# Altium PCB P-FTINT-1-1.PcbDoc
Units mm, origin at the board's own origin, x right, y up, seen from the top; angles counter-clockwise.
Board outline 50.02 x 70.01 mm, 2 copper layers (Component Side, Solder Side); 26 components, 40 nets, 145 pads, 13 vias.
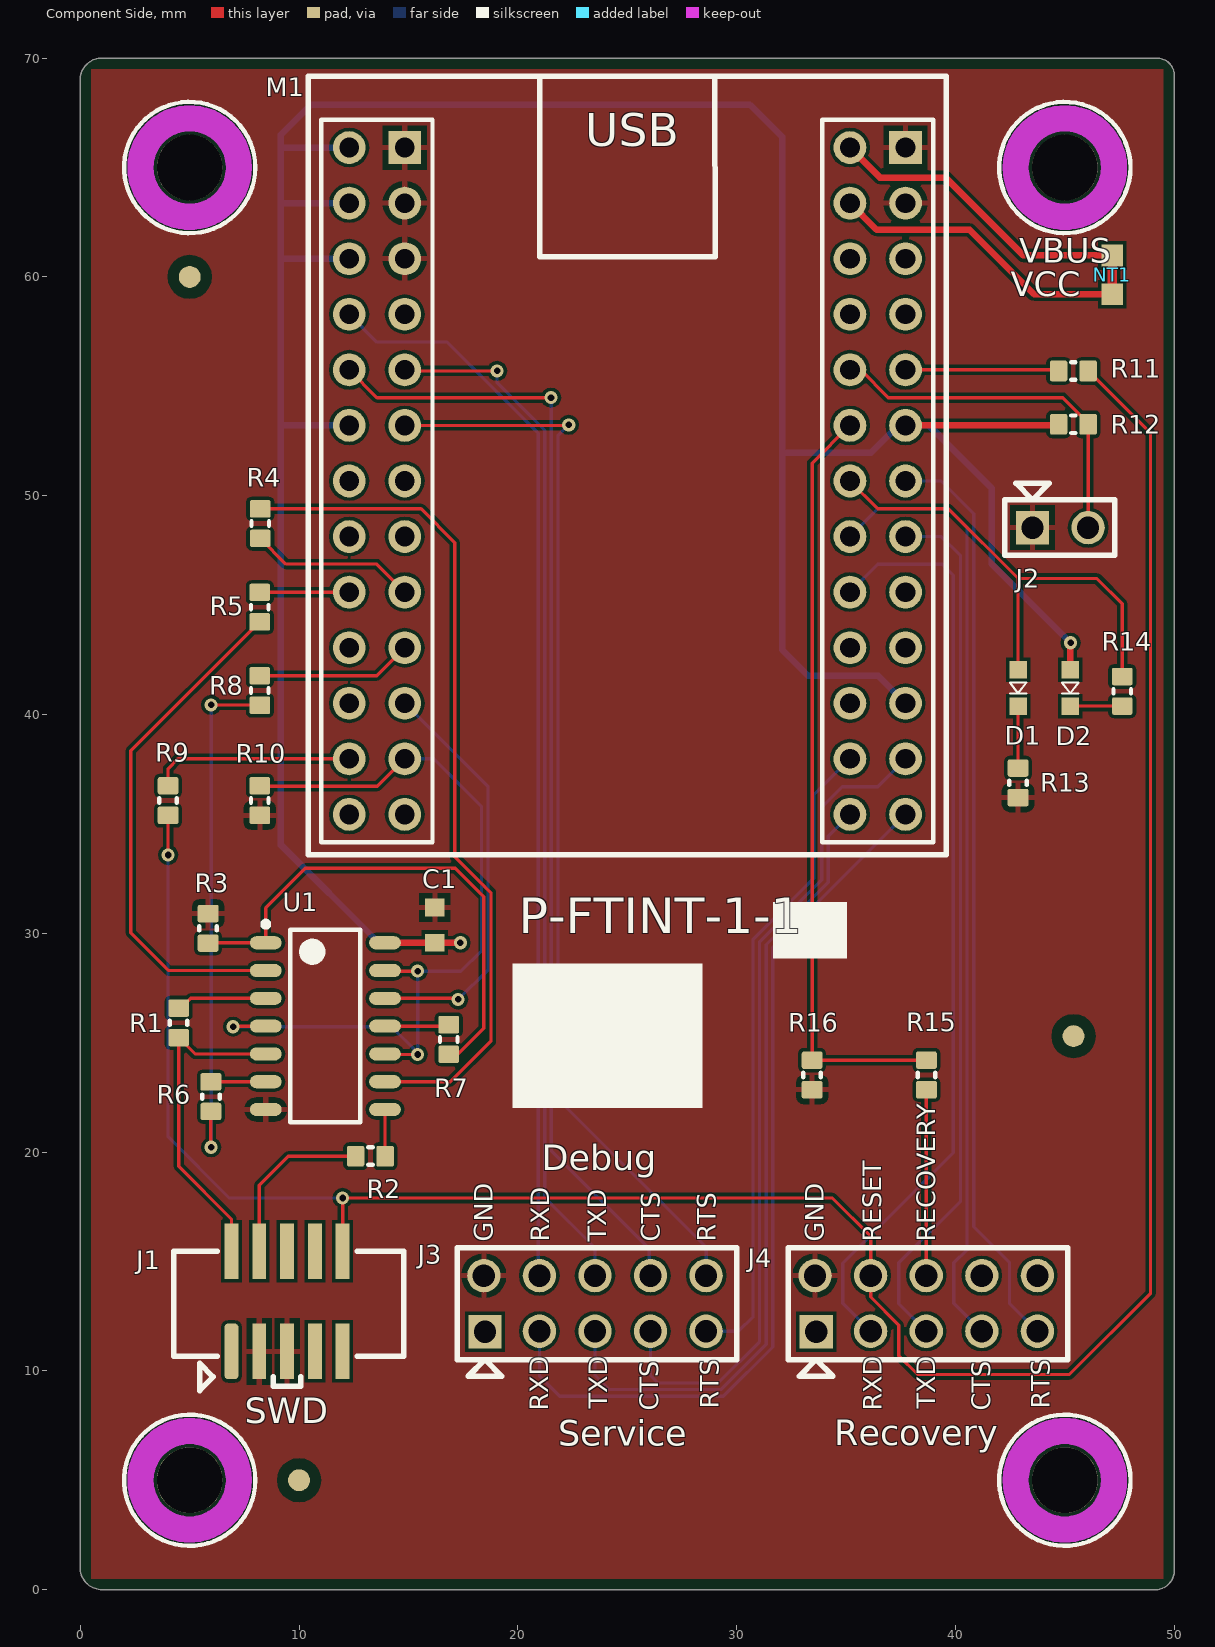
[diagram p0: Component Side view]
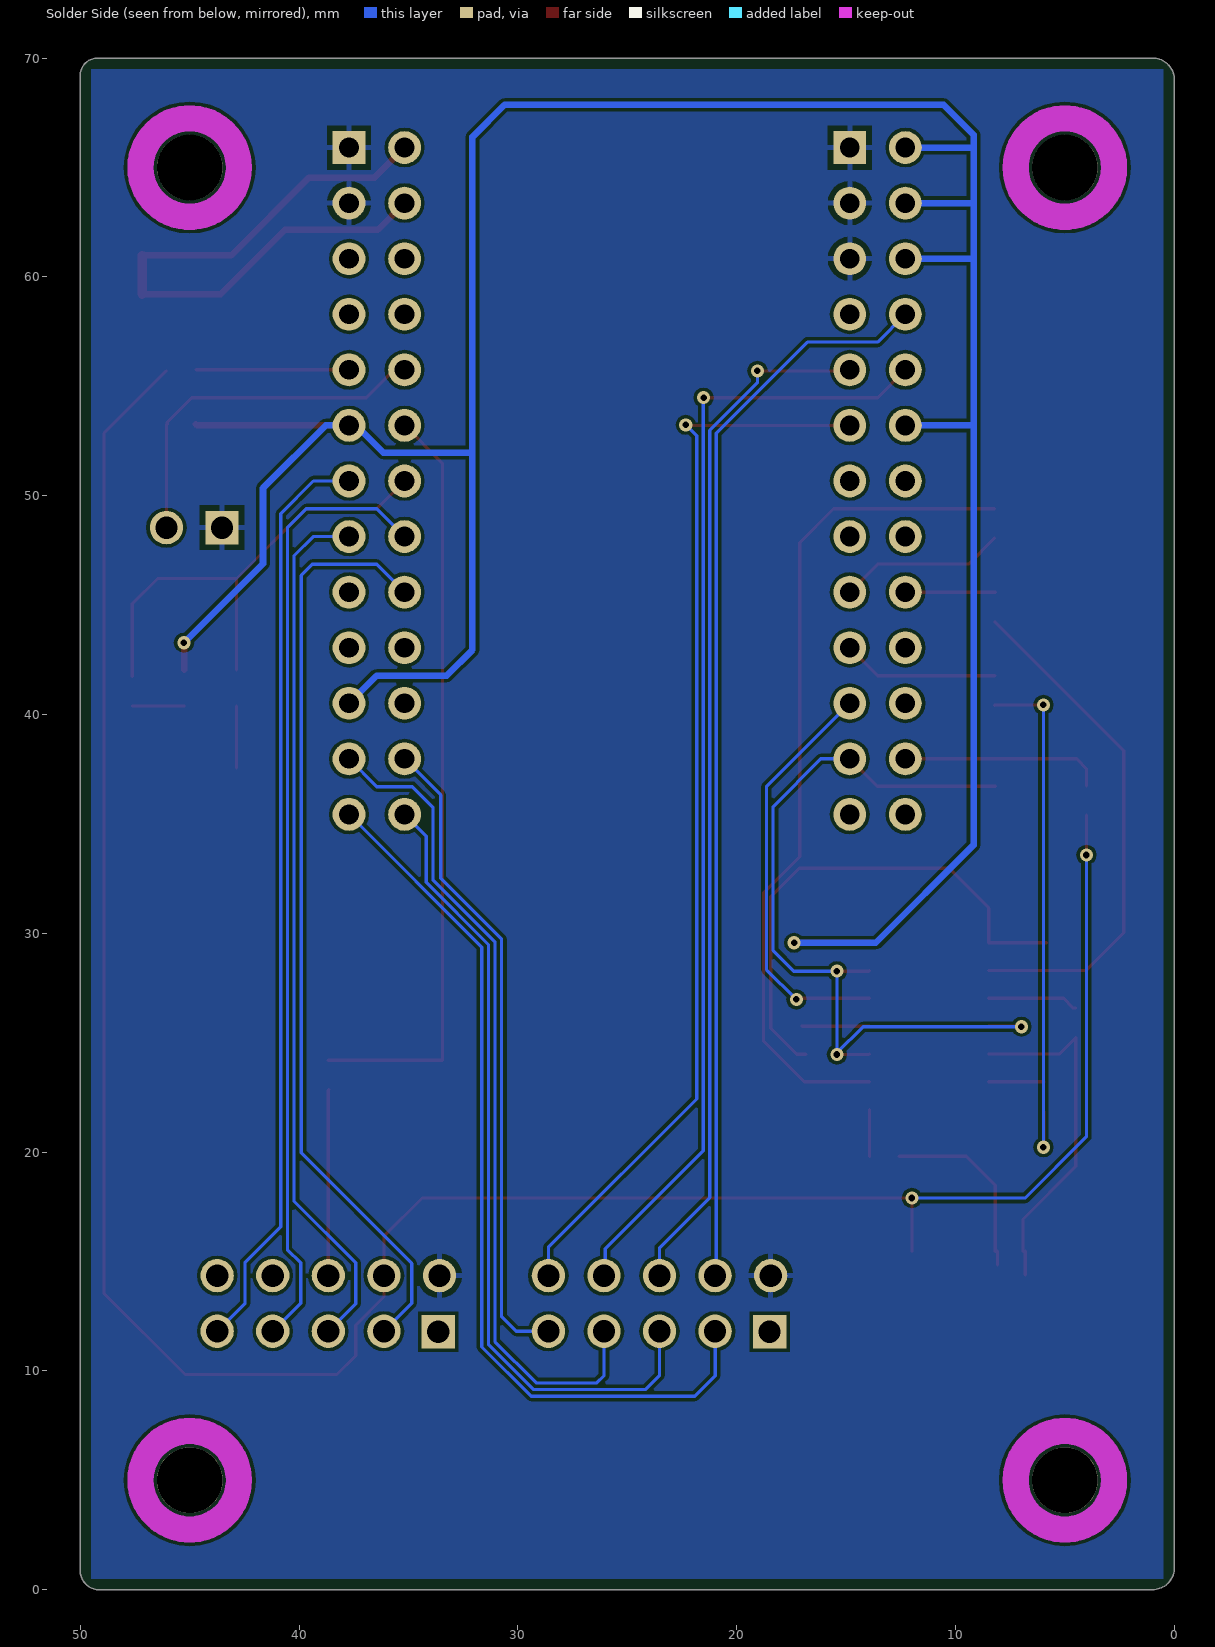
[diagram p1: Solder Side view, seen from below]

## Layer stack, top to bottom
Top Solder: solder mask 0.0102, Solder Resist, Dk 3.5
Component Side: signal copper 0.0356
Dielectric 1: core 0.32, FR-4, Dk 4.8
Solder Side: signal copper 0.0356
Bottom Solder: solder mask 0.0102, Solder Resist, Dk 3.5

## Board outline
-0.009,1 -0.009,69.002 cw(c0.991,69.002) 0.991,70.002 0.991,70 49.213,70 cw(c49.213,69.202) 50.011,69.202 50.011,0.889 cw(c49.109,0.889) 49.109,-0.013 49.109,0 0.991,0 cw(c0.991,1)

## Design rules (kind name [scope] priority, off if disabled: settings)
Clearance Clearance_RF [InNetClass('RF') vs InNet('GND')] p1: gap=0.17 ignorepadtopadclearanceinfootprint=FALSE
Clearance Clearance_RFD [InNetClass('RFD') vs InNet('GND')] p2: gap=0.127 ignorepadtopadclearanceinfootprint=FALSE
Clearance Clearance_Fiducials [(IsPad) AND (Name = 'Free-1') vs InNet('GND')] p3: gap=0.5 ignorepadtopadclearanceinfootprint=FALSE
Clearance [All] p4: gap=0.15 ignorepadtopadclearanceinfootprint=FALSE
ComponentClearance [All] p1: gap=0.125 collisioncheckmode=3 verticalgap=0.254 showdistances=FALSE
DiffPairsRouting [All] p1: maxlimit=0.3 minlimit=0.125 mostfreqgap=0.125 toplayer_minwidth=0.125 toplayer_maxwidth=0.3 toplayer_prefwidth=0.125 bottomlayer_minwidth=0.125 bottomlayer_maxwidth=0.3 bottomlayer_prefwidth=0.125 maxuncoupledlength=12.7
HoleSize [All] p1: absolutevalues=TRUE maxlimit=3 minlimit=0.2 maxpercent=80.000 minpercent=20.000
MinimumSolderMaskSliver [All] p1: minsoldermaskwidth=0.01
PlaneClearance [All] p1: clearance=0.3
PlaneConnect PlaneConnect_IsVia [IsVia] p1: planeconnectstyle=Direct reliefexpansion=0.508 reliefentries=4 reliefconductorwidth=0.254 reliefairgap=0.254
PlaneConnect [All] p2: planeconnectstyle=Relief reliefexpansion=0.508 reliefentries=4 reliefconductorwidth=0.254 reliefairgap=0.254
PolygonConnect PolygonConnect_IsVia [IsVia] p1: connectstyle=Direct reliefconductorwidth=0.254 reliefentries=4 polygonreliefangle="90 Angle" airgapwidth=0.254
PolygonConnect PolygonConnect_RF [HasCompParameter('NoThermalRelief')] p2: connectstyle=Direct reliefconductorwidth=0.254 reliefentries=4 polygonreliefangle="90 Angle" airgapwidth=0.254
PolygonConnect [All] p3: connectstyle=Relief reliefconductorwidth=0.254 reliefentries=4 polygonreliefangle="90 Angle" airgapwidth=0.254
RoutingCorners [All] p1: cornerstyle=45-Degree minsetback=1 maxsetback=1
RoutingVias [All] p1: holewidth=0.3 width=0.6 viastyle="Through Hole" minholewidth=0.3 minwidth=0.6 maxholewidth=0.3 maxwidth=0.6
SilkToSilkClearance [All] p1: silktosilkclearance=0.05
SilkToSolderMaskClearance [IsPad] p1: minsilkscreentomaskgap=0.1 clearancetoexposedcopper=TRUE
SolderMaskExpansion [All] p1: expansion=0.102
Width Width_1 [InNet('GND')] p1: maxlimit=0.3 minlimit=0.15 preferedwidth=0.3
Width Width_VCC [InNet('VCC')] p2: maxlimit=0.3 minlimit=0.15 preferedwidth=0.3
Width Width_VBUS [InNet('VBUS')] p3: maxlimit=0.3 minlimit=0.15 preferedwidth=0.3
Width "Width 3V3" [InNet('3V3')] p4: maxlimit=0.3 minlimit=0.15 preferedwidth=0.3
Width [All] p5: maxlimit=0.8 minlimit=0.15 preferedwidth=0.15
21 further rules are at their usual default settings.

## Components (designator, comment, footprint, x,y, rotation, side; value= is the part's Value field where it differs from the comment)
C1 "0.1uF" "CAP 0603 (1608) x 1.2mm" 16.205,30.378 r270 top
D1 "SML-D12U" "Rohm SML-D12 Red" 42.862,41.211 r90 top
D2 "SML-D12P" "Rohm SML-D12 Green" 45.25,41.211 r90 top
J1 "FTSH-105-01-F-DV-K" SAMTEC-FTSH-105-01-X-DV-K 9.45,13.175 r90 top
J2 "MOLEX-0022284020" 0022284020 43.474,48.514 r0 top
J3 "0901310765" 901310765 18.445,11.81 r0 top
J4 "0901310765" 901310765 33.585,11.81 r0 top
M1 "FT4232H-56QMINIMDL" FT4232H-56Q 25.004,50.673 r0 top locked
NT1 "NetTie" NetTie 47.168,60.096 r90 top net-tie
R1 "33R" RES0603 4.496,25.908 r90 top
R2 "33R" RES0603 13.259,19.812 r0 top
R3 "4K7" RES0603 5.842,30.226 r90 top
R4 "33R" RES0603 8.225,48.725 r90 top
R5 "33R" RES0603 8.204,44.907 r270 top
R6 "33R" RES0603 5.969,22.53 r90 top
R7 "33R" RES0603 16.84,25.146 r90 top
R8 "33R" RES0603 8.204,41.097 r270 top
R9 "4K7" RES0603 4.013,36.068 r270 top
R10 "4K7" RES0603 8.204,36.068 r270 top
R11 "4K7" RES0603 45.39,55.702 r0 top
R12 "4K7" RES0603 45.39,53.264 r0 top
R13 "604R" RES0603 42.862,36.878 r270 top
R14 "604R" RES0603 47.625,41.061 r90 top
R15 "2K2" RES0603 38.675,23.525 r270 top
R16 "2K2" RES0603 33.45,23.525 r270 top
U1 "74LCX126MX" 74LCX126MX 11.201,25.756 r0 top

## Footprints (in the part's own frame and the unit in brackets; to place one, negate y for a bottom-side part, rotate by r counter-clockwise, add the part's x,y. Pads: shape width x height; smd on the part's side, far side on the other; paste and mask are expansions set on the pad)
74LCX126MX [mm] "SOIC, 14-Leads, Body 8.63x3.90mm, Pitch 1.27mm, IPC Medium Density"
  oval 1.45x0.6 smd: 1(-2.725,3.81) 2(-2.725,2.54) 3(-2.725,1.27) 4(-2.725,0) 5(-2.725,-1.27) 6(-2.725,-2.54) 7(-2.725,-3.81) 8(2.725,-3.81) 9(2.725,-2.54) 10(2.725,-1.27) 11(2.725,0) 12(2.725,1.27) 13(2.725,2.54) 14(2.725,3.81)
  silkscreen extent -2.85,-4.4 1.6,4.78, body extent -2,-4.4 2,4.4, height 1.75
0022284020 [mil] "2-way header"
  rect 60x60 hole 40: 1(2,1)
  round 60 hole 40: 2(102,1)
  silkscreen extent -48,-49 150,81, body extent -50,-49 150,49, height 330
901310765 [mil] "2-row 5-way header"
  rect 60x60 hole 40: 1(2,-1)
  round 60 hole 40: 2(0,100) 3(100,0) 4(100,100) 5(200,0) 6(200,100) 7(300,0) 8(300,100) 9(400,0) 10(400,100)
  silkscreen extent -48,-81 455,150, body extent -50,-50 450,150, height 364
"CAP 0603 (1608) x 1.2mm" [mm] "murata largest recogmended dimentions for 1608 +-0.2mm"
  rect 0.8x0.9 smd: 1(-0.8,0) 2(0.8,0)
  body extent -0.9,-0.5 0.9,0.5, height 1.2
FT4232H-56Q [mm]
  rect 1.5x1.5 hole 0.9: CN2-1(-10.175,15.24) CN3-1(12.715,15.24)
  round 1.5 hole 0.9: CN2-2(-12.715,15.24) CN2-3(-10.175,12.7) CN2-4(-12.715,12.7) CN2-5(-10.175,10.16) CN2-6(-12.715,10.16) CN2-7(-10.175,7.62) CN2-8(-12.715,7.62) CN2-9(-10.175,5.08) CN2-10(-12.715,5.08) CN2-11(-10.175,2.54) CN2-12(-12.715,2.54) CN2-13(-10.175,0) CN2-14(-12.715,0) CN2-15(-10.175,-2.54) CN2-16(-12.715,-2.54) CN2-17(-10.175,-5.08) CN2-18(-12.715,-5.08) CN2-19(-10.175,-7.62) CN2-20(-12.715,-7.62) CN2-21(-10.175,-10.16) CN2-22(-12.715,-10.16) CN2-23(-10.175,-12.7) CN2-24(-12.715,-12.7) CN2-25(-10.175,-15.24) CN2-26(-12.715,-15.24) CN3-2(10.175,15.24) CN3-3(12.715,12.7) CN3-4(10.175,12.7) CN3-5(12.715,10.16) CN3-6(10.175,10.16) CN3-7(12.715,7.62) CN3-8(10.175,7.62) CN3-9(12.715,5.08) CN3-10(10.175,5.08) CN3-11(12.715,2.54) CN3-12(10.175,2.54) CN3-13(12.715,0) CN3-14(10.175,0) CN3-15(12.715,-2.54) CN3-16(10.175,-2.54) CN3-17(12.715,-5.08) CN3-18(10.175,-5.08) CN3-19(12.715,-7.62) CN3-20(10.175,-7.62) CN3-21(12.715,-10.16) CN3-22(10.175,-10.16) CN3-23(12.715,-12.7) CN3-24(10.175,-12.7) CN3-25(12.715,-15.24) CN3-26(10.175,-15.24)
  silkscreen extent -14.58,-17.09 14.58,18.5
NetTie [mm]
  rect 1x1 smd paste-1: 1(-0.889,0) 2(0.889,0)
  Component Side lines w0.42: -0.889,0 0.889,0
RES0603 [mm] "Chip Resistor EIA0603, 2-Leads, Body 1.60x0.80mm, IPC Medium Density"
  rrect25% 0.8x0.95 smd: 1(-0.675,0)
  rrect20% 0.8x0.95 smd: 2(0.675,0)
  silkscreen extent -0.1,-0.4 0.1,0.4, body extent -0.87,-0.48 0.87,0.48, height 0.45
"Rohm SML-D12 Green" [mm]
  rect 0.8x0.8 smd paste-0.05: 1(-0.825,0) 2(0.825,0)
  silkscreen extent -0.25,-0.38 0.25,0.38, body extent -0.8,-0.4 0.8,0.4, height 0.55
"Rohm SML-D12 Red" [mm]
  rect 0.8x0.8 smd paste-0.05: 1(-0.825,0) 2(0.825,0)
  silkscreen extent -0.25,-0.38 0.25,0.38, body extent -0.8,-0.4 0.8,0.4, height 0.55
SAMTEC-FTSH-105-01-X-DV-K [mil] ".050\" Micro Terminal Strip, 10 pos"
  rrect50% 100x25 smd: 1(-90,100)
  rect 100x25 smd: 2(90,100) 3(-90,50) 4(90,50) 5(-90,0) 6(90,0) 7(-90,-50) 8(90,-50) 9(-90,-100) 10(90,-100)
  silkscreen extent -160,-210 90,204, body extent -118,-125 112,125, height 242

## Part data
C1: library part CGA3E2X7R1E104K080AA, "CAP CER 0.1UF 25V X7R 0603", Capacitance=100nF, Case/Package=0603, Case Code (Metric)=1608, Dielectric=X7R, Manufacturer=TDK, Max Operating Temperature=125°C, Min Operating Temperature=-55°C, Package Quantity=1, Ratings=AEC-Q200, Supplier Part Number 1=445-5667-1-ND, Tolerance=10%, Voltage Rating=25V, Case Code (Imperial)=0603, ComponentLink1Description=http://www.farnell.com/datasheets/1735392.pdf?src-supplier=Element14, ComponentLink1URL=http://www.farnell.com/datasheets/1735392.pdf?src-supplier=Element14, ComponentLink2Description=https://product.tdk.com/info/en/documents/chara_sheet/CGA3E2X7R1E104K080AA.pdf?src-supplier=Mouser, ComponentLink2URL=https://product.tdk.com/info/en/documents/chara_sheet/CGA3E2X7R1E104K080AA.pdf?src-supplier=Mouser, ComponentLink3Description=http://product.tdk.com/capacitor/mlcc/en/documents/mlccspec_automotive_general_midvoltage_en.pdf?src-supplier=Future+Electronics, ComponentLink3URL=http://product.tdk.com/capacitor/mlcc/en/documents/mlccspec_automotive_general_midvoltage_en.pdf?src-supplier=Future+Electronics, ComponentLink4Description=http://www.farnell.com/datasheets/1913358.pdf?src-supplier=Newark, ComponentLink4URL=http://www.farnell.com/datasheets/1913358.pdf?src-supplier=Newark, Composition=Ceramic, Depth=0.8mm, Height=0.8mm, Lead Free="Lead Free", Length=1.6mm, Manufacturer Part Number=CGA3E2X7R1E104K080AA, Mount="Surface Mount", Packaging="Tape and Reel", Pricing 1="1=0.1, 10=0.057, 100=0.0253, 500=0.0181, 1000=0.01422 (USD)", REACH SVHC="No SVHC", Stock 1=1795818, Supplier 1=Digi-Key, Termination=SMD/SMT, Thickness=0.035inch, Voltage Rating (DC)=25V, Weight=7.1E-05oz, Width=0.031inch
D1: "1.6 x 0.8 x 0.55mm (0603) LED 620nm Red", Colour=Red, Current - Test=20mA, Luminous Flux @ Current - Test=-, Manufacturer="Rohm Semiconductor", Manufacturer Part Number=SML-D12U8WT86, Millicandela Rating=63mcd, Package / Case="0603 (1608 Metric)", Supplier Part Number 1=511-1580-1-ND, Voltage - Forward (Vf) (Typ)=2.2V, Category=Optoelectronics, ComponentLink1Description=http://rohmfs.rohm.com/en/products/databook/datasheet/opto/led/chip_mono/sml-d1.pdf, ComponentLink1URL=http://rohmfs.rohm.com/en/products/databook/datasheet/opto/led/chip_mono/sml-d1.pdf, Height=0.55mm, Lens Style/Size="Rectangle with Flat Top, 1.2mm x 0.8mm", Lens Type="Diffused, White", Mounting Type="Surface Mount", Packaging="Cut Tape (CT)", Pricing 1="1=0.38, 10=0.279, 25=0.2232, 100=0.1478, 250=0.1046, 500=0.08926, 1000=0.06974 (GBP)", RoHS="RoHS Compliant", Size / Dimension="1.60mm L x 0.80mm W", Stock 1=5722, Supplier 1=Digi-Key, Supplier 2=Farnell, Supplier Part Number 2=1685094, Viewing Angle=-, Wavelength - Dominant=620nm, Wavelength - Peak=-
D2: "1.6 x 0.8 x 0.55mm (0603) LED 560nm Green", Colour=Green, Current - Test=20mA, Luminous Flux @ Current - Test=-, Manufacturer="Rohm Semiconductor", Manufacturer Part Number=SML-D12P8WT86, Millicandela Rating=6.3mcd, Package / Case="0603 (1608 Metric)", Supplier Part Number 1=511-1579-1-ND, Voltage - Forward (Vf) (Typ)=2.2V, Category=Optoelectronics, ComponentLink1Description=http://rohmfs.rohm.com/en/products/databook/datasheet/opto/led/chip_mono/sml-d1.pdf, ComponentLink1URL=http://rohmfs.rohm.com/en/products/databook/datasheet/opto/led/chip_mono/sml-d1.pdf, Height=0.55mm, Lens Style/Size="Rectangle with Flat Top, 1.2mm x 0.8mm", Lens Type="Diffused, White", Mounting Type="Surface Mount", Packaging="Cut Tape (CT)", Pricing 1="1=0.38, 10=0.279, 25=0.2232, 100=0.1478, 250=0.1046, 500=0.08926, 1000=0.06974 (GBP)", RoHS="RoHS Compliant", Size / Dimension="1.60mm L x 0.80mm W", Stock 1=19305, Supplier 1=Digi-Key, Viewing Angle=-, Wavelength - Dominant=560nm, Wavelength - Peak=-
J1: "CONN HEADER 10POS DUAL .05\" SMD", Color=Black, Manufacturer="Samtec Inc.", Supplier Part Number 1=SAM8796-ND, Category="Connectors, Interconnects", ComponentLink1Description=http://suddendocs.samtec.com/prints/ftsh-1xx-xx-xxx-dv-xxx-mkt.pdf, ComponentLink1URL=http://suddendocs.samtec.com/prints/ftsh-1xx-xx-xxx-dv-xxx-mkt.pdf, Connector Type="Header, Unshrouded", Contact Finish=Gold, Contact Finish Thickness="3µin (0.08µm)", Contact Mating Length="0.120\" (3.05mm)", Contact Type="Male Pin", Fastening Type=-, Features="Keying Shroud", Manufacturer Part Number=FTSH-105-01-F-DV-K, Mounting Type="Surface Mount", Number of Positions=10, Number of Positions Loaded=All, Number of Rows=2, Packaging=Tube, Pitch="0.050\" (1.27mm)", Pricing 1="1=2.26, 10=1.907, 50=1.647, 100=1.4737, 250=1.30032, 500=1.21362, 1000=1.12693, 2500=1.08358, 5000=1.06191 (GBP)", RoHS="RoHS Compliant", Row Spacing="0.050\" (1.27mm)", Stock 1=13304, Supplier 1=Digi-Key, Termination=Solder
J2: "CONN HEADER 2POS .100 VERT TIN", Color=Black, Manufacturer="Molex, LLC", Manufacturer Part Number=0022284020, Supplier Part Number 1=WM50014-02-ND, Category="Connectors, Interconnects", ComponentLink1Description=http://www.molex.com/pdm_docs/sd/022284020_sd.pdf, ComponentLink1URL=http://www.molex.com/pdm_docs/sd/022284020_sd.pdf, Connector Type="Header, Unshrouded, Breakaway", Contact Finish=Tin, Contact Finish Thickness="100µin (2.54µm)", Contact Mating Length="0.240\" (6.10mm)", Contact Type="Male Pin", Fastening Type=-, Features=-, Mounting Type="Through Hole", Number of Positions=2, Number of Positions Loaded=All, Number of Rows=1, Packaging=Bulk, Pitch="0.100\" (2.54mm)", Pricing 1="1=0.12, 10=0.108, 25=0.0808, 50=0.0692, 100=0.0668, 250=0.0576, 500=0.0553 (GBP)", RoHS="RoHS Compliant", Row Spacing=-, Stock 1=10077, Supplier 1=Digi-Key, Termination=Solder
J3 J4: library part MOLEX-0901310765, "CONN HEADER 10POS .100\" STR GOLD", Color=Black, Manufacturer="Molex, LLC", Supplier Part Number 1=WM8141-ND, Category="Connectors, Interconnects", ComponentLink1Description=http://www.molex.com/pdm_docs/sd/901310765_sd.pdf, ComponentLink1URL=http://www.molex.com/pdm_docs/sd/901310765_sd.pdf, Connector Type="Header, Unshrouded, Breakaway", Contact Finish=Gold, Contact Finish Thickness="15µin (0.38µm)", Contact Mating Length="0.266\" (6.75mm)", Contact Type="Male Pin", Fastening Type=-, Features=-, Manufacturer Part Number=0901310765, Mounting Type="Through Hole", Number of Positions=10, Number of Positions Loaded=All, Number of Rows=2, Packaging=Bulk, Pitch="0.100\" (2.54mm)", Pricing 1="1=1.43, 10=1.297, 50=1.1642, 100=1.1112, 250=1.0054, 500=0.92604, 1000=0.79374 (GBP)", RoHS="RoHS Compliant", Row Spacing="0.100\" (2.54mm)", Stock 1=977, Supplier 1=Digi-Key, Termination=Solder
M1: "IC MINI MODULE USB/FIFO 56QFN", Case/Package=Module, Manufacturer=FTDI, Max Operating Temperature=85°C, Min Operating Temperature=-40°C, Supplier Part Number 1=2535452, Features=I²C, Manufacturer Part Number=FT4232H-56QMINIMDL, Packaging=Bulk, Pricing 1="1=20.62 (GBP)", REACH SVHC="No SVHC", Stock 1=0, Supplier 1=Farnell
R1 R2 R4 R5 R6 R7 R8: library part ERJ-3GEYJ330V, "RES SMD 33 OHM 5% 1/10W 0603", Case/Package=0603, Case Code (Metric)=1608, Manufacturer=Panasonic, Max Operating Temperature=155°C, Max Power Dissipation=100mW, Min Operating Temperature=-55°C, Package Quantity=1, Supplier Part Number 1=P33GCT-ND, Temperature Coefficient=200ppm/°C, Tolerance=5%, Voltage Rating=75V, Voltage Rating (DC)=50V, Case Code (Imperial)=0603, ComponentLink1Description=http://www.mouser.com/ds/2/315/AOA0000CE1-37422.pdf?src-supplier=Mouser, ComponentLink1URL=http://www.mouser.com/ds/2/315/AOA0000CE1-37422.pdf?src-supplier=Mouser, ComponentLink2Description=https://www.verical.com/server-webapp/html/getDatasheet?partID=52004&src-supplier=Verical, ComponentLink2URL=https://www.verical.com/server-webapp/html/getDatasheet?partID=52004&src-supplier=Verical, ComponentLink3Description=http://www.farnell.com/datasheets/2059623.pdf?src-supplier=Farnell, ComponentLink3URL=http://www.farnell.com/datasheets/2059623.pdf?src-supplier=Farnell, ComponentLink4Description=http://industrial.panasonic.com/www-data/pdf/AOA0000/AOA0000CE1.pdf?src-supplier=Avnet, ComponentLink4URL=http://industrial.panasonic.com/www-data/pdf/AOA0000/AOA0000CE1.pdf?src-supplier=Avnet, ComponentLink5Description=http://www.farnell.com/datasheets/1500035.pdf?src-supplier=Element14, ComponentLink5URL=http://www.farnell.com/datasheets/1500035.pdf?src-supplier=Element14, Composition="Thick Film", Contact Plating=Tin, Depth=0.8mm, Features="Automotive AEC-Q200", Height=0.45mm, Lead Free="Lead Free", Length=1.6mm, Manufacturer Part Number=ERJ-3GEYJ330V, Military Standard=Not, Mount="Surface Mount", Number of Terminations=2, Packaging="Tape and Reel", Power Rating=100mW, Pricing 1="1=0.1, 10=0.043, 100=0.0176, 1000=0.00791, 2500=0.00686 (USD)", Radiation Hardening=No, REACH SVHC="No SVHC", Resistance=33R, Stock 1=1457212, Supplier 1=Digi-Key, Termination=SMD/SMT, Width=0.8mm
R3 R9 R10 R11 R12: library part ERJ-3GEYJ472V, "RES SMD 4.7K OHM 5% 1/10W 0603", Case/Package=0603, Case Code (Metric)=1608, Manufacturer=Panasonic, Max Operating Temperature=155°C, Max Power Dissipation=100mW, Min Operating Temperature=-55°C, Package Quantity=1, Resistance=4.7kR, Supplier Part Number 1=P4.7KGCT-ND, Temperature Coefficient=200ppm/°C, Tolerance=5%, Voltage Rating=75V, Voltage Rating (DC)=50V, Case Code (Imperial)=0603, ComponentLink1Description=http://www.farnell.com/datasheets/2059623.pdf?src-supplier=Element14, ComponentLink1URL=http://www.farnell.com/datasheets/2059623.pdf?src-supplier=Element14, ComponentLink2Description=http://www.mouser.com/ds/2/315/AOA0000C84-947596.pdf?src-supplier=Mouser, ComponentLink2URL=http://www.mouser.com/ds/2/315/AOA0000C84-947596.pdf?src-supplier=Mouser, ComponentLink3Description=http://www.farnell.com/datasheets/2059623.pdf?src-supplier=Farnell, ComponentLink3URL=http://www.farnell.com/datasheets/2059623.pdf?src-supplier=Farnell, ComponentLink4Description=http://industrial.panasonic.com/www-data/pdf/AOA0000/AOA0000CE1.pdf?src-supplier=Avnet+Asia, ComponentLink4URL=http://industrial.panasonic.com/www-data/pdf/AOA0000/AOA0000CE1.pdf?src-supplier=Avnet+Asia, ComponentLink5Description=http://www.farnell.com/datasheets/1678796.pdf?src-supplier=Element14, ComponentLink5URL=http://www.farnell.com/datasheets/1678796.pdf?src-supplier=Element14, ComponentLink6Description=https://www.alliedelec.com/m/d/51cd0790071e1666bdb9d00c57fcf960.pdf?src-supplier=Allied+Electronics, ComponentLink6URL=https://www.alliedelec.com/m/d/51cd0790071e1666bdb9d00c57fcf960.pdf?src-supplier=Allied+Electronics, ComponentLink7Description=http://industrial.panasonic.com/www-data/pdf/AOA0000/AOA0000CE1.pdf?src-supplier=Avnet, ComponentLink7URL=http://industrial.panasonic.com/www-data/pdf/AOA0000/AOA0000CE1.pdf?src-supplier=Avnet, ComponentLink8Description=http://www.jameco.com/Jameco/Products/ProdDS/921942.pdf?src-supplier=Jameco, ComponentLink8URL=http://www.jameco.com/Jameco/Products/ProdDS/921942.pdf?src-supplier=Jameco, Composition="Thick Film", Contact Plating=Tin, Depth=0.8mm, Features="Automotive AEC-Q200", Height=0.45mm, Lead Free="Lead Free", Length=1.6mm, Manufacturer Part Number=ERJ-3GEYJ472V, Military Standard=Not, Mount="Surface Mount", Number of Terminations=2, Packaging="Tape and Reel", Power Rating=100mW, Pricing 1="1=0.1, 10=0.043, 100=0.0176, 1000=0.00791, 2500=0.00686 (USD)", Radiation Hardening=No, REACH SVHC="No SVHC", Stock 1=7744297, Supplier 1=Digi-Key, Termination=SMD/SMT, Width=0.031inch, Working Voltage=75V
R13 R14: library part ERJ-3EKF6040V, "RES SMD 604 OHM 1% 1/10W 0603", Case/Package=0603, Case Code (Metric)=1608, Manufacturer=Panasonic, Max Operating Temperature=155°C, Max Power Dissipation=100mW, Min Operating Temperature=-55°C, Package Quantity=1, Supplier Part Number 1=P604HCT-ND, Temperature Coefficient=100ppm/°C, Tolerance=1%, Voltage Rating=75V, Voltage Rating (DC)=50V, Case Code (Imperial)=0603, ComponentLink1Description=http://www.jameco.com/Jameco/Products/ProdDS/1988284.pdf?src-supplier=Jameco, ComponentLink1URL=http://www.jameco.com/Jameco/Products/ProdDS/1988284.pdf?src-supplier=Jameco, ComponentLink2Description=http://www.farnell.com/datasheets/1678782.pdf?src-supplier=Element14, ComponentLink2URL=http://www.farnell.com/datasheets/1678782.pdf?src-supplier=Element14, ComponentLink3Description=https://www.alliedelec.com/m/d/623f45ff1957d936ff56d46fd1c28cac.pdf?src-supplier=Allied+Electronics, ComponentLink3URL=https://www.alliedelec.com/m/d/623f45ff1957d936ff56d46fd1c28cac.pdf?src-supplier=Allied+Electronics, ComponentLink4Description=http://www.onlinecomponents.com/productFiles/mf-PSC/aoa0000ce2.pdf?src-supplier=Onlinecomponents.com, ComponentLink4URL=http://www.onlinecomponents.com/productFiles/mf-PSC/aoa0000ce2.pdf?src-supplier=Onlinecomponents.com, ComponentLink5Description=http://www.mouser.com/ds/2/315/AOA0000C304-1149620.pdf?src-supplier=Mouser, ComponentLink5URL=http://www.mouser.com/ds/2/315/AOA0000C304-1149620.pdf?src-supplier=Mouser, ComponentLink6Description=http://www.farnell.com/datasheets/1911175.pdf?src-supplier=Farnell, ComponentLink6URL=http://www.farnell.com/datasheets/1911175.pdf?src-supplier=Farnell, ComponentLink7Description=http://www.farnell.com/datasheets/426256.pdf?src-supplier=Element14, ComponentLink7URL=http://www.farnell.com/datasheets/426256.pdf?src-supplier=Element14, Composition="Thick Film", Contact Plating=Tin, Depth=0.8mm, Features="Automotive AEC-Q200", Height=0.45mm, Lead Free="Lead Free", Length=1.6mm, Manufacturer Part Number=ERJ-3EKF6040V, Military Standard=Not, Mount="Surface Mount", Number of Terminations=2, Packaging="Tape and Reel", Power Rating=100mW, Pricing 1="1=0.1, 10=0.065, 100=0.0264, 1000=0.01186, 2500=0.01029 (USD)", Radiation Hardening=No, REACH SVHC="No SVHC", Resistance=604R, Stock 1=478130, Supplier 1=Digi-Key, Termination=SMD/SMT, Weight=7.1E-05oz, Width=0.031inch
R15 R16: library part ERJ-3GEYJ222V, "RES SMD 2.2K OHM 5% 1/10W 0603", Case/Package=0603, Case Code (Metric)=1608, Manufacturer=Panasonic, Max Operating Temperature=155°C, Max Power Dissipation=100mW, Min Operating Temperature=-55°C, Package Quantity=1, Resistance=2.2kR, Supplier Part Number 1=P2.2KGCT-ND, Temperature Coefficient=200ppm/°C, Tolerance=5%, Voltage Rating=75V, Voltage Rating (DC)=50V, Case Code (Imperial)=0603, ComponentLink1Description=https://www.alliedelec.com/m/d/51cd0790071e1666bdb9d00c57fcf960.pdf?src-supplier=Allied+Electronics, ComponentLink1URL=https://www.alliedelec.com/m/d/51cd0790071e1666bdb9d00c57fcf960.pdf?src-supplier=Allied+Electronics, ComponentLink2Description=http://industrial.panasonic.com/www-data/pdf/AOA0000/AOA0000CE1.pdf?src-supplier=Avnet, ComponentLink2URL=http://industrial.panasonic.com/www-data/pdf/AOA0000/AOA0000CE1.pdf?src-supplier=Avnet, ComponentLink3Description=http://www.farnell.com/datasheets/2059623.pdf?src-supplier=Element14, ComponentLink3URL=http://www.farnell.com/datasheets/2059623.pdf?src-supplier=Element14, ComponentLink4Description=https://industrial.panasonic.com/cdbs/www-data/pdf/RDA0000/AOA0000C301.pdf?src-supplier=Future+Electronics, ComponentLink4URL=https://industrial.panasonic.com/cdbs/www-data/pdf/RDA0000/AOA0000C301.pdf?src-supplier=Future+Electronics, ComponentLink5Description=http://www.jameco.com/Jameco/Products/ProdDS/1988639.pdf?src-supplier=Jameco, ComponentLink5URL=http://www.jameco.com/Jameco/Products/ProdDS/1988639.pdf?src-supplier=Jameco, ComponentLink6Description=http://industrial.panasonic.com/www-data/pdf/AOA0000/AOA0000CE1.pdf?src-supplier=Avnet+Europe, ComponentLink6URL=http://industrial.panasonic.com/www-data/pdf/AOA0000/AOA0000CE1.pdf?src-supplier=Avnet+Europe, ComponentLink7Description=http://www.farnell.com/datasheets/2059623.pdf?src-supplier=Farnell, ComponentLink7URL=http://www.farnell.com/datasheets/2059623.pdf?src-supplier=Farnell, ComponentLink8Description=http://www.farnell.com/datasheets/1678796.pdf?src-supplier=Element14, ComponentLink8URL=http://www.farnell.com/datasheets/1678796.pdf?src-supplier=Element14, Composition="Thick Film", Contact Plating=Tin, Depth=0.8mm, Features="Automotive AEC-Q200", Height=0.45mm, Lead Free="Lead Free", Length=1.6mm, Manufacturer Part Number=ERJ-3GEYJ222V, Military Standard=Not, Mount="Surface Mount", Number of Terminations=2, Packaging="Tape and Reel", Power Rating=100mW, Pricing 1="1=0.1, 10=0.043, 100=0.0176, 1000=0.00791, 2500=0.00686 (USD)", Radiation Hardening=No, REACH SVHC="No SVHC", Stock 1=4299124, Supplier 1=Digi-Key, Termination=SMD/SMT, Width=0.8mm, Working Voltage=75V
U1: "Buffers & Line Drivers LV Quad Buffer 5V Tolerant I/O", Case/Package=SOIC, High Level Output Current=-24mA, Low Level Output Current=24mA, Manufacturer="ON Semiconductor / Fairchild", Max Operating Temperature=85°C, Max Supply Voltage=3.6V, Min Operating Temperature=-40°C, Min Supply Voltage=2V, Package Quantity=2500, Quiescent Current=10uA, Supplier Part Number 1=74LCX126MX-ND, ComponentLink1Description=http://www.mouser.com/ds/2/149/74LCX126-106501.pdf?src-supplier=Mouser, ComponentLink1URL=http://www.mouser.com/ds/2/149/74LCX126-106501.pdf?src-supplier=Mouser, ComponentLink2Description=http://www.fairchildsemi.com/datasheets/74/74LCX126.pdf?src-supplier=Digi-Key, ComponentLink2URL=http://www.fairchildsemi.com/datasheets/74/74LCX126.pdf?src-supplier=Digi-Key, ComponentLink3Description=https://www.fairchildsemi.com/datasheets/74/74LCX126.pdf?src-supplier=Avnet, ComponentLink3URL=https://www.fairchildsemi.com/datasheets/74/74LCX126.pdf?src-supplier=Avnet, ComponentLink4Description=http://www.produktinfo.conrad.com/datenblaetter/1200000-1299999/001251913-da-01-en-IC_BUFFER_QUAD_LV_74LCX126MX_SOIC_14_FSC.pdf?src-supplier=Conrad, ComponentLink4URL=http://www.produktinfo.conrad.com/datenblaetter/1200000-1299999/001251913-da-01-en-IC_BUFFER_QUAD_LV_74LCX126MX_SOIC_14_FSC.pdf?src-supplier=Conrad, Contact Plating=Tin,Matte, Height=1.5mm, Lead Free="Lead Free", Length=8.75mm, Logic Function=Buffer,Inverting, Manufacturer Part Number=74LCX126MX, Mount="Surface Mount", Number of Bits=4, Number of Bits per Element=1, Number of Channels=4, Number of elements=4, Number of Input Lines=4, Number of Inputs=4, Number of Output Lines=3, Number of Outputs=4, Number of Pins=14, Packaging="Tape and Reel", Polarity=Non-Inverting, Propagation Delay=5.5ns, Radiation Hardening=No, Schmitt Trigger Input=No, Stock 1=0, Supplier 1=Digi-Key, Turn-On Delay Time=7.8ns, Weight=0.15g, Width=4mm

## Free pads (board coordinates)
  round 3 hole 3 unplated: 0(5,5) 0(5,65) 0(45,5) 0(45,65)
  round 1 smd paste-1 mask+0.5: 1(5,60) 1(10,5) 1(45.4,25.3)

## Via types
v1: diameter 0.6, hole 0.3, Component Side to Solder Side, tented both sides, 13 vias

## Nets (pads, with @x,y where several pads share a name; then routed paths per layer and width w, separated by ;. In a path a pad name is that pad's centre, name@x,y a point inside that pad or via, vN(x,y) a via of type N, cw(c..) or ccw(c..) an arc to the next point about the centre after c; other vN are vias at no path point)
3V3: C1.2 D2.2 M1.CN2-2 M1.CN2-4 M1.CN2-6 M1.CN2-12 M1.CN3-11 M1.CN3-21 R12.1 U1.14 | length 140.8
  Component Side w0.3: U1.14 v1(17.374,29.566) ; M1.CN3-11 44.664,53.213 R12.1 ; D2.2 45.25,43.268 v1(45.263,43.282)
  Solder Side w0.3: M1.CN2-12 9.195,53.213 9.169,53.238 ; M1.CN2-6 9.169,60.833 ; M1.CN2-4 9.22,63.373 9.169,63.322 ; M1.CN2-2 9.169,65.913 ; v1(17.374,29.566) 13.64,29.566 9.169,34.036 9.169,53.238 ; M1.CN3-21 36.46,41.772 33.259,41.772 32.08,42.951 32.08,51.918 ; v1(45.263,43.282) 41.65,46.894 41.65,50.349 38.786,53.213 M1.CN3-11 37.389,53.213 36.144,51.968 32.131,51.968 32.08,51.918 ; 9.169,53.238 9.169,60.833 ; 9.169,60.833 9.169,63.322 ; 9.169,63.322 9.169,65.913 ; 9.169,65.913 9.169,66.497 10.541,67.869 30.607,67.869 32.08,66.396 32.08,51.918
DD4: D1.2 M1.CN3-14 R14.2 | length 22.3
  Component Side w0.15: M1.CN3-14 36.449,49.403 39.675,49.403 42.862,46.216 ; D1.2 42.862,46.216 ; R14.2 47.625,45.06 46.469,46.216 42.862,46.216
DD7: J2.2 M1.CN3-10 R12.2 | length 16.7
  Component Side w0.15: M1.CN3-10 35.662,55.753 36.932,54.483 44.907,54.483 46.025,53.365 46.025,53.264 46.065,53.224 J2.2
DEBUG_CTS: J3.8 M1.CN2-10 | length 51.8
  Component Side w0.15: M1.CN2-10 13.559,54.483 v1(21.514,54.483)
  Solder Side w0.15: v1(21.514,54.483) 21.53,54.467 21.53,20.065 26.01,15.585 26.01,14.35 J3.8
DEBUG_RTS: J3.10 M1.CN2-11 | length 50.1
  Component Side w0.15: M1.CN2-11 22.301,53.213 v1(22.327,53.238)
  Solder Side w0.15: v1(22.327,53.238) 21.83,52.741 21.83,22.425 28.605,15.65 J3.10 ; J3.10@28.55,13.677 J3.10@28.55,14.35
DEBUG_RXD: J3.4 M1.CN2-8 | length 50.1
  Solder Side w0.15: M1.CN2-8 13.559,57.023 16.764,57.023 20.93,52.857 J3.4@20.93,13.677
DEBUG_TXD: J3.6 M1.CN2-9 | length 48.1
  Component Side w0.15: M1.CN2-9 14.88,55.702 v1(19.05,55.702)
  Solder Side w0.15: v1(19.05,55.702) 19.05,55.161 21.23,52.982 21.23,17.92 23.525,15.625 J3.6 ; J3.6@23.47,13.677 J3.6@23.47,14.35
GND: C1.1 J1.3 J1.5 J2.1 J3.2 J4.2 M1.CN2-1 M1.CN2-3 M1.CN2-5 M1.CN3-1 M1.CN3-3 R3.2 R10.2 R13.2 R16.2 U1.7
NetD1_1: D1.1 R13.1 | length 2.8
  Component Side w0.15: R13.1 D1.1
NetD2_1: D2.1 R14.1 | length 2.4
  Component Side w0.15: D2.1 R14.1
NetJ4_6: J4.6 R15.2 | length 9.2
  Component Side w0.15: R15.2@38.65,22.85 38.665,22.835 J4.6 J4.6@38.665,13.677
NetM1_CN2-17: M1.CN2-17 R4.1 | length 7.8
  Component Side w0.15: R4.1 9.4,46.875 13.547,46.875 M1.CN2-17 M1.CN2-17@14.961,45.593
NetM1_CN2-18: M1.CN2-18 R5.1 | length 4.1
  Component Side w0.15: R5.1@8.179,45.593 M1.CN2-18
NetM1_CN2-19: M1.CN2-19 R8.1 | length 7.2
  Component Side w0.15: R8.1 13.548,41.772 M1.CN2-19
NetM1_CN2-24: M1.CN2-24 R9.1 | length 9.2
  Component Side w0.15: R9.1 4.013,37.525 4.461,37.973 M1.CN2-24
NetM1_CN3-9: M1.CN3-9 R11.1 | length 7
  Component Side w0.15: M1.CN3-9 R11.1@44.715,55.753
NetR1_2: R1.2 U1.3 | length 4.2
  Component Side w0.15: R1.2 4.612,26.583 5.055,27.026 U1.3
NetR2_2: R2.2 U1.8 | length 2.1
  Component Side w0.15: U1.8 13.926,19.819 R2.2
NetR6_2: R6.2 U1.6 | length 2.5
  Component Side w0.15: R6.2 5.98,23.216 U1.6
NetR7_2: R7.2 U1.11 | length 3.1
  Component Side w0.15: U1.11 17.003,25.756 R7.2@17.018,25.77
RECOVERY: M1.CN3-12 R15.1 R16.1 | length 35
  Component Side w0.15: M1.CN3-12 33.45,51.484 R16.1 R15.1
RECOVERY_CTS: J4.7 M1.CN3-16 | length 43.7
  Solder Side w0.15: M1.CN3-16 36.449,49.403 39.675,49.403 40.534,48.544 40.534,15.54 39.929,14.935 39.929,13.086 J4.7
RECOVERY_RTS: J4.9 M1.CN3-13 | length 42.3
  Solder Side w0.15: M1.CN3-13 39.345,50.673 40.843,49.174 40.843,16.586 42.469,14.961 42.469,13.086 J4.9
RECOVERY_RXD: J4.3 M1.CN3-18 | length 42.6
  Solder Side w0.15: M1.CN3-18 36.449,46.863 39.395,46.863 39.903,46.355 39.903,19.964 34.849,14.91 34.849,13.086 J4.3
RECOVERY_TXD: J4.5 M1.CN3-15 | length 40
  Solder Side w0.15: M1.CN3-15 39.352,48.133 40.234,47.252 40.234,17.755 37.414,14.935 37.414,13.061 J4.5
SERVICE_CTS: J3.7 M1.CN3-23 | length 38.8
  Solder Side w0.15: J3.7 26.065,9.774 26.391,9.449 29.159,9.449 31.048,11.338 31.048,29.611 33.884,32.446 33.884,35.763 34.823,36.703 36.449,36.703 M1.CN3-23 M1.CN3-23@37.719,37.44
SERVICE_RTS: J3.9 M1.CN3-24 | length 30.6
  Component Side w0.15: M1.CN3-24@35.179,37.788 M1.CN3-24
  Solder Side w0.15: J3.9@28.605,11.137 J3.9 30.083,11.81 30.748,12.475 30.748,29.735 33.528,32.515 33.528,36.322 M1.CN3-24
SERVICE_RXD: J3.3 M1.CN3-25 | length 40.9
  Solder Side w0.15: J3.3 20.985,9.774 21.92,8.839 29.398,8.839 31.648,11.089 31.648,29.362 M1.CN3-25
SERVICE_TXD: J3.5 M1.CN3-26 | length 36.8
  Solder Side w0.15: J3.5 23.525,9.8 24.181,9.144 29.279,9.144 31.348,11.214 31.348,29.487 34.184,32.322 34.184,34.438 M1.CN3-26
SWCLK: J1.4 R2.1 | length 8.6
  Component Side w0.15: J1.4@8.077,14.834 J1.4@8.077,15.461 ; J1.4 8.18,18.492 9.5,19.812 R2.1
SWCLK_F: R4.2 U1.9 | length 38.6
  Component Side w0.15: R4.2 15.575,49.4 17.12,47.855 17.12,33.503 18.771,31.852 18.771,25.07 16.916,23.216 U1.9
SWD_EN: M1.CN2-23 R10.1 U1.4 U1.10 U1.13 | length 38.7
  Component Side w0.15: v1(6.985,25.73) 7.01,25.756 U1.4 ; R10.1@8.179,36.718 13.574,36.718 M1.CN2-23 ; U1.10 13.952,24.46 v1(15.418,24.46) ; U1.13 13.952,28.27 v1(15.418,28.27)
  Solder Side w0.15: v1(6.985,25.73) 14.224,25.73 v1@15.418,24.536 ; M1.CN2-23 16.154,37.973 18.339,35.789 18.339,29.21 17.399,28.27 v1(15.418,28.27) v1@15.418,24.536 ; v1(15.418,24.46) v1@15.418,24.536
SWDIO: J1.2 R1.1 U1.5 | length 16.1
  Component Side w0.15: J1.2@6.807,14.376 J1.2@6.807,15.461 ; J1.2 6.91,16.941 4.496,19.355 R1.1 5.243,24.486 U1.5
SWDIO_DIR: R3.1 R7.1 U1.1 | length 23.6
  Component Side w0.15: R3.1 5.857,29.566 U1.1 8.476,31.159 10.287,32.969 17.145,32.969 18.44,31.674 18.44,25.654 17.257,24.471 R7.1
SWDIO_DIR_F: M1.CN2-21 U1.12 | length 19
  Component Side w0.15: U1.12 17.221,27.026 v1(17.272,26.975)
  Solder Side w0.15: M1.CN2-21 18.639,36.703 18.639,28.342 v1(17.272,26.975)
SWDIO_IN_F: R6.1 R8.2 | length 24.1
  Component Side w0.15: R6.1 5.969,20.229 v1(5.98,20.218) ; v1(5.98,40.437) 8.19,40.437 R8.2
  Solder Side w0.15: v1(5.98,20.218) v1(5.98,40.437)
SWDIO_OUT_F: R5.2 U1.2 | length 23.5
  Component Side w0.15: R5.2 2.311,38.339 2.311,30.023 4.039,28.296 U1.2
SYSRST_N: J1.10 J4.4 R9.2 R11.2 | length 113.9
  Component Side w0.15: v1(4.013,33.579) R9.2 ; J1.10 v1(11.99,17.9) 34.375,17.9 36.125,16.15 J4.4 36.125,13.375 37.414,12.086 37.414,10.693 38.275,9.833 45.208,9.833 48.92,13.545 48.92,15 48.92,52.07 48.92,52.847 R11.2
  Solder Side w0.15: v1(4.013,33.579) 4.013,20.701 6.814,17.9 v1(11.99,17.9)
VBUS: M1.CN3-2 NT1.2 | length 14
  Component Side w0.3: M1.CN3-2 36.551,64.541 39.55,64.541 43.106,60.985 NT1.2
VCC: M1.CN3-4 NT1.1 | length 13.7
  Component Side w0.3: M1.CN3-4 36.398,62.154 40.646,62.154 43.593,59.207 NT1.1
pads on no net: J1.1 J1.6 J1.7 J1.8 J1.9 J3.1 J4.1 J4.8 J4.10 M1.CN2-7 M1.CN2-13 M1.CN2-14 M1.CN2-15 M1.CN2-16 M1.CN2-20 M1.CN2-22 M1.CN2-25 M1.CN2-26 M1.CN3-5 M1.CN3-6 M1.CN3-7 M1.CN3-8 M1.CN3-17 M1.CN3-19 M1.CN3-20 M1.CN3-22

## Polygon pours and split planes (outlines as drawn)
GND on Component Side "Component Side-GND" (solid, pour order 3): 0.5,0.5 0.5,69.5 49.5,69.5 49.5,0.5
GND on Solder Side "Solder Side-GND" (solid, pour order 4): 0.5,0.5 0.5,69.5 49.5,69.5 49.5,0.5

## Keep-outs
Component Side:
  circle w1.2: c5,65 r2.25
  circle w1.2: c45,65 r2.25
  circle w1.2: c45,5 r2.25
  circle w1.2: c5,5 r2.25
Solder Side:
  circle w1.2: c5,65 r2.25
  circle w1.2: c45,65 r2.25
  circle w1.2: c45,5 r2.25
  circle w1.2: c5,5 r2.25

## Silkscreen, mask and mechanical layers (free items; w line width, h text height)
Top Overlay:
  circle w0.2: c5,5 r3
  circle w0.2: c45,5 r3
  circle w0.2: c5,65 r3
  circle w0.2: c45,65 r3
  region: 35.052,28.854 35.052,31.429 31.652,31.429 31.652,28.854
  rectangle: 19.75,22.025 28.45,28.625
  text "VBUS" at 42.925,60.275 h1.9
  text "VCC" at 42.525,58.75 h1.9
  text "P-FTINT-1-1" at 20.041,29.464 h2.8
  text "Debug" at 21.1,18.775 h2
  text "GND" at 18.85,15.9 h0.85 r90
  text "RXD" at 21.425,15.9 h0.85 r90
  text "TXD" at 24.05,15.9 h0.85 r90
  text "CTS" at 26.475,15.9 h0.85 r90
  text "RTS" at 29.05,15.9 h0.85 r90
  text "GND" at 33.975,15.9 h0.85 r90
  text "RESET" at 36.6,15.9 h0.85 r90
  text "RECOVERY" at 39.075,15.9 h0.85 r90
  text "TXD" at 24.075,8.264 h0.85 r90
  text "RTS" at 29.175,8.264 h0.85 r90
  text "TXD" at 39.075,8.264 h0.85 r90
  text "RTS" at 44.3,8.264 h0.85 r90
  text "RXD" at 21.4,8.175 h0.85 r90
  text "CTS" at 26.425,8.175 h0.85 r90
  text "RXD" at 36.625,8.175 h0.85 r90
  text "CTS" at 41.6,8.175 h0.85 r90
  text "SWD" at 7.525,7.221 h2
  text "Recovery" at 34.45,6.2 h2
  text "Service" at 21.85,6.178 h2
Board Outline (31):
  lines w0.254: 0.991,70 49.213,70 cw(c49.213,69.202) 50.011,69.202 50.011,0.889 cw(c49.109,0.889) 49.109,-0.013 ; 0.991,70.002 ccw(c0.991,69.002) -0.009,69.002 -0.009,1 ccw(c0.991,1) 0.991,0 49.109,0

## Text inside footprints (layer, text, board x,y; h text height)
M1: Top Overlay "USB" at 23.079,65.973 h1.52